# EAGLE board Muhammad Arya Widiantoro_driver (EAGLE 9.6.2)
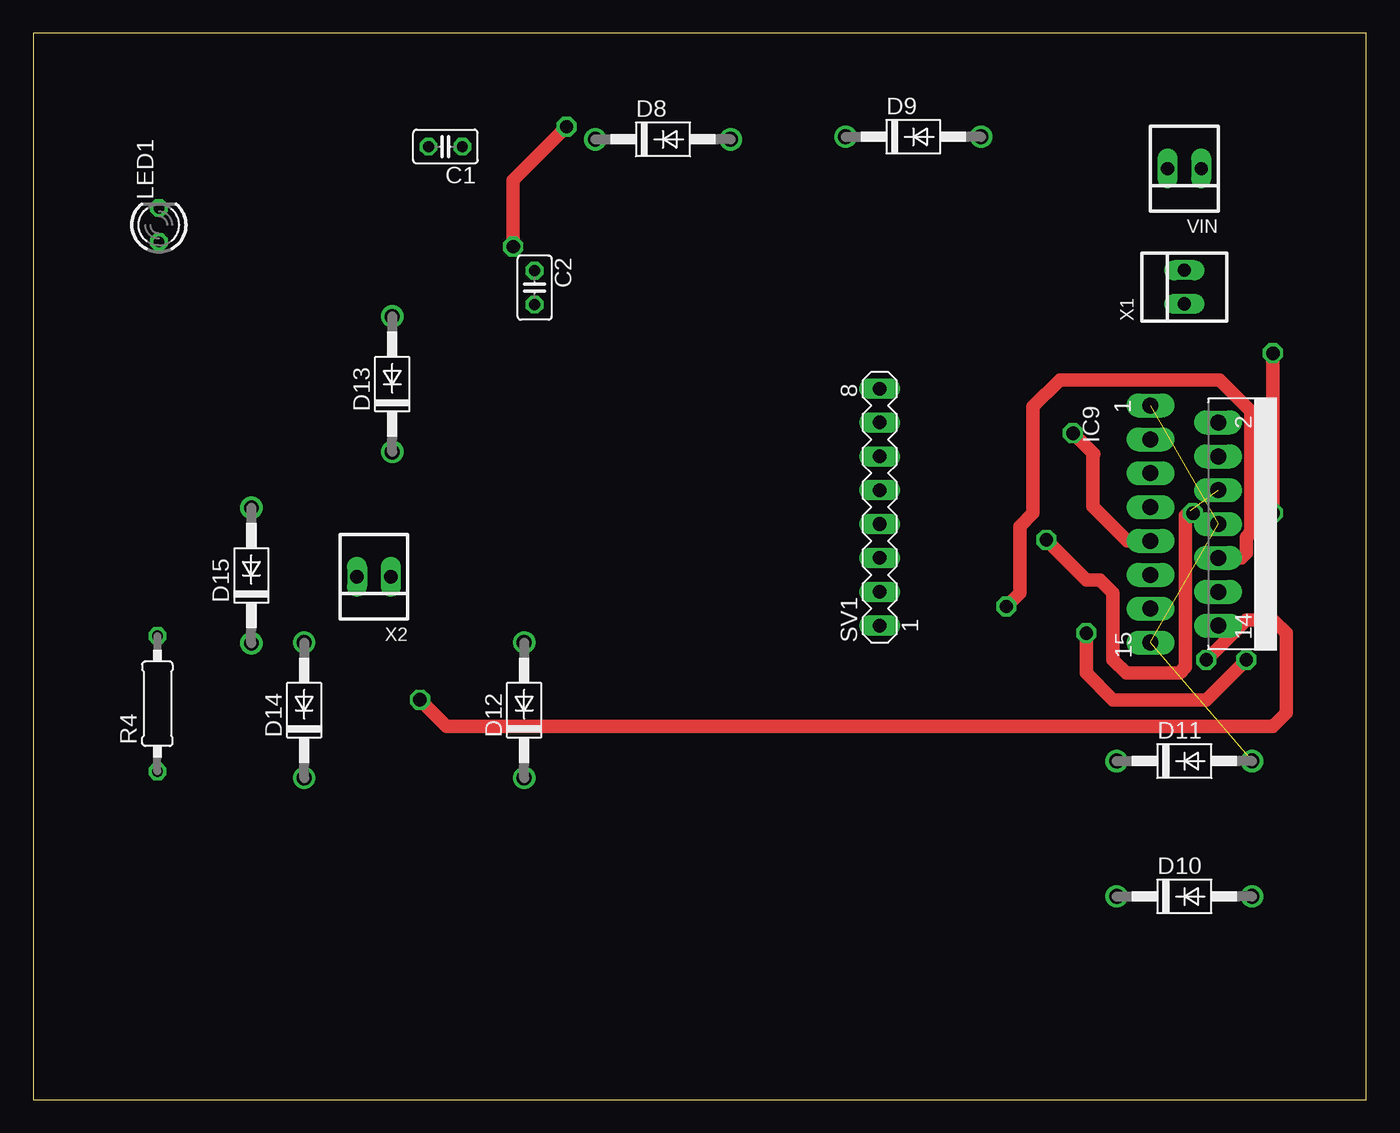
[diagram p0: board, top side]
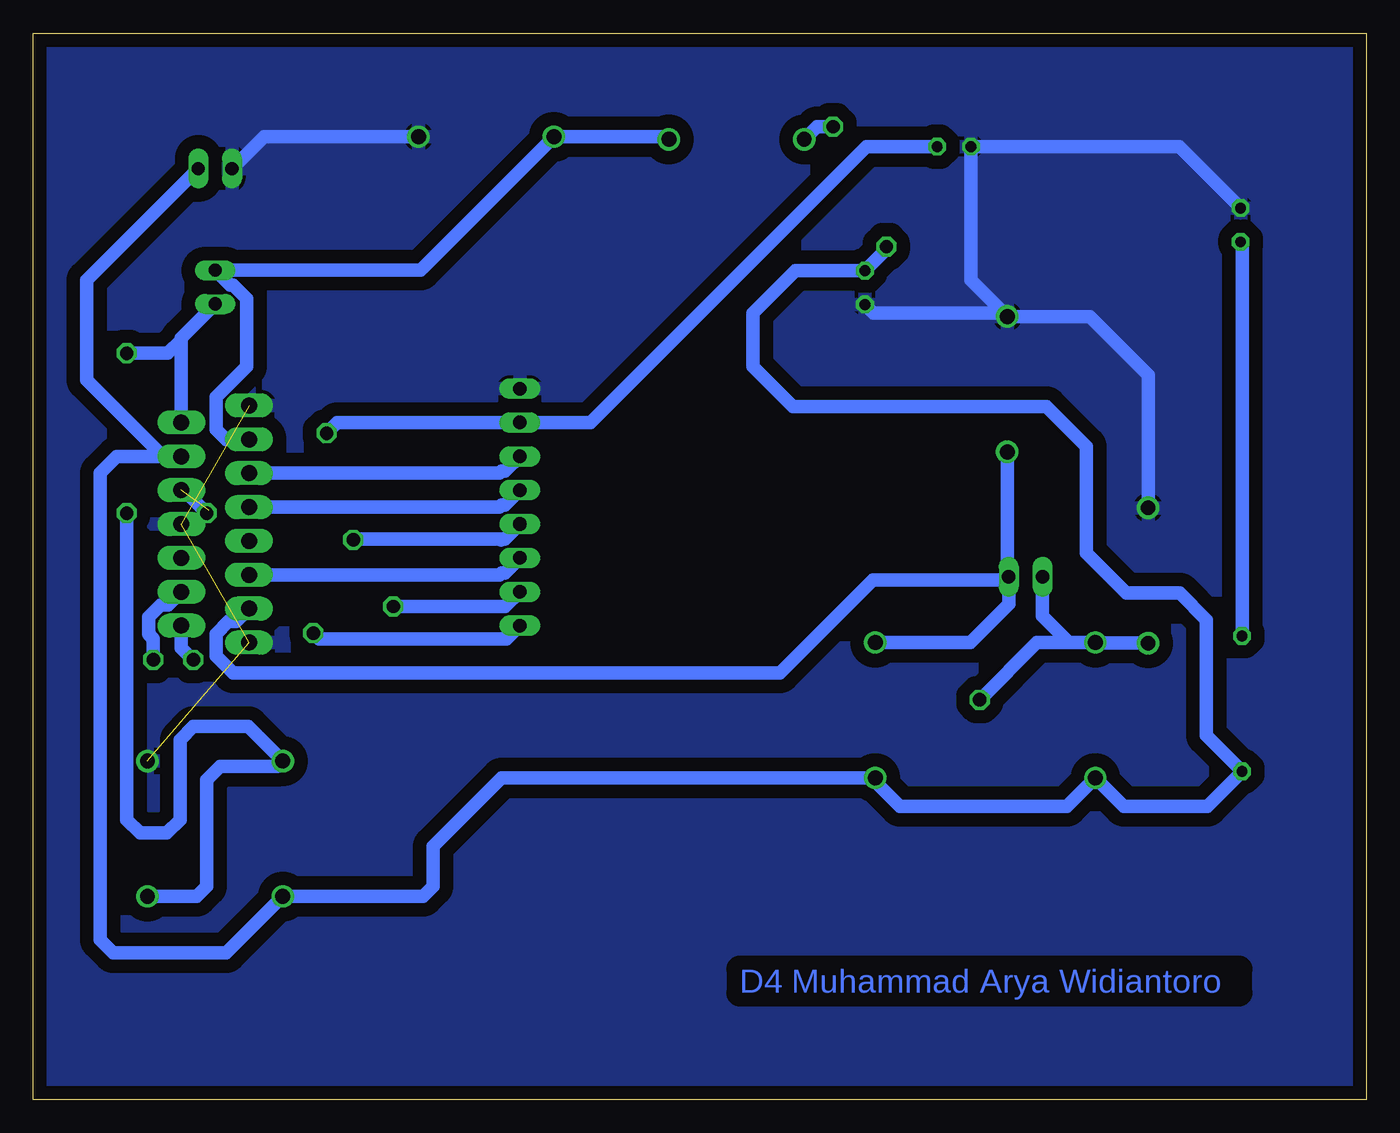
[diagram p1: board, bottom side, seen from below]

Size 100 x 80 mm. Coordinates in mm from the lower left corner, seen from the top.
Outline: 0,0 100,0 100,80 0,80 0,0
Copper layers (1*16): Top 0.035mm / dielectric 1.5mm / Bottom 0.035mm
Design rules "default": minimum track width 6mil, minimum drill 0.35mm, track to track 6mil, track to pad 6mil, pad to pad 6mil, via to via 6mil, smd to smd 6mil, copper to edge 40mil, drill to drill 6mil, minimum pad ring 10mil, minimum via ring 8mil, stop-mask expansion 4mil, vias tented up to drill 0mil, thermal gap 10mil

## Footprints (pad centres in the part's own frame; a part is rotated, then mirrored left to right if it is on the bottom)
C025-025X050 = drill 0.813 octagon: 1 -1.27,0; 2 1.27,0
DO41-10 = drill 1.118: A 5.08,0; C -5.08,0
MULTIWATT-15 = drill 1.2 long: 1 -8.89,-7.62; 2 -7.62,-2.54; 3 -6.35,-7.62; 4 -5.08,-2.54; 5 -3.81,-7.62; 6 -2.54,-2.54; 7 -1.27,-7.62; 8 0,-2.54; 9 1.27,-7.62; 10 2.54,-2.54; 11 3.81,-7.62; 12 5.08,-2.54; 13 6.35,-7.62; 14 7.62,-2.54; 15 8.89,-7.62
LED3MM = drill 0.813 octagon: A -1.27,0; K 1.27,0
0207/10 = drill 0.813 octagon: 1 -5.08,0; 2 5.08,0
MA08-1 = drill 1.016 long: 1 -8.89,0; 2 -6.35,0; 3 -3.81,0; 4 -1.27,0; 5 1.27,0; 6 3.81,0; 7 6.35,0; 8 8.89,0
22-23-2021 = drill 1 long: 1 -1.27,0; 2 1.27,0

## Placement (x,y rotation side)
C1  100nF  [C025-025X050]  30.92,71.5 180 top
C2  100nF  [C025-025X050]  37.61,60.92 270 top
D8  1N4004  [DO41-10]  47.24,72.05 0 top
D9  1N4004  [DO41-10]  66.02,72.24 0 top
D10  1N4004  [DO41-10]  86.36,15.24 0 top
D11  1N4004  [DO41-10]  86.36,25.4 0 top
D12  1N4004  [DO41-10]  36.83,29.21 90 top
D13  1N4004  [DO41-10]  26.93,53.67 90 top
D14  1N4004  [DO41-10]  20.32,29.21 90 top
D15  1N4004  [DO41-10]  16.36,39.32 90 top
IC9  L298  [MULTIWATT-15]  91.44,43.18 270 top
LED1  [LED3MM]  9.42,65.62 90 top
R4  330  [0207/10]  9.31,29.7 90 top
SV1  [MA08-1]  63.5,44.45 90 top
VIN  22-23-2021  [22-23-2021]  86.36,69.85 180 top
X1  22-23-2021  [22-23-2021]  86.36,60.96 90 top
X2  22-23-2021  [22-23-2021]  25.55,39.23 180 top

## Library data of the parts
C1 C2 R4 = rcl
D8-D15 = diode
IC9 = st-microelectronics
LED1 = led
SV1 = con-lstb; OC_FARNELL: unknown; OC_NEWARK: unknown
VIN X1 X2 = con-molex; MF: MOLEX; MPN: 22-23-2021; OC_FARNELL: 1462926; OC_NEWARK: 25C3832

## Nets
GND: C1.2 C2.2 D9.A D11.A D13.A D15.A IC9.1 IC9.8 IC9.15 LED1.K SV1.8 VIN.2
N$1: IC9.5 SV1.6
N$3: IC9.7 SV1.5
N$5: IC9.12 SV1.1
N$8: IC9.10 SV1.2
N$16: IC9.6 SV1.4
N$17: IC9.11 SV1.3
N$44: LED1.A R4.2
N$204: D8.A D9.C IC9.3 X1.2
N$205: D10.A D11.C IC9.2 X1.1
N$206: D12.A D13.C IC9.13 X2.1
N$207: D14.A D15.C IC9.14 X2.2
VCC: C1.1 IC9.9 SV1.7
VDD: C2.1 D8.C D10.C D12.C D14.C IC9.4 R4.1 VIN.1

## Tracks (layer width: path | path; a pad name or v marks a point on that pad's centre or on a via)
GND  (3 unrouted)
  Bottom 1.016: LED1.K 14.03,71.5 C1.2 29.65,61.47 D13.A | D13.A 20.75,58.75 16.36,54.36 D15.A | C2.2 36.96,59 27.18,59 D13.A | VIN.2 82.7,72.24 D9.A
  pour Bottom (isolate 1.016): 0,79 0,0 100,0 100,80 0,80
N$1
  Bottom 1.016: SV1.6 64.62,47.14 64.85,47.14 65,46.99 IC9.5
N$2  (via drill 1)
  Bottom 1.016: v87,44 89,46
N$3
  Bottom 1.016: SV1.5 64.62,44.6 64.85,44.6 65,44.45 IC9.7
N$5  (via drill 1)
  Top 1.016: v79,35 79,32 81,30 88,30 v91,33
  Bottom 1.016: SV1.1 64.5,34.56 78.56,34.56 v79,35 | v91,33 91,34.55 91.36,34.91 91.36,36.21 90.45,37.12 89.88,37.12 IC9.12
N$8  (via drill 1)
  Top 1.016: v73,37 74,38 74,43 75,44 75,52 77,54 89,54 91.36,51.64 91.36,42.53 91,42.17 91,41 90.64,40.64 IC9.10
  Bottom 1.016: SV1.2 64.6,37 v73,37
N$16  (via drill 1)  (1 unrouted)
  Top 1.016: 86.81,44.19 86.44,43.83 86.44,32.44 86,32 82,32 81,33 81,38 80,39 79,39 v76,42
  Bottom 1.016: SV1.4 64.62,42.06 64.85,42.06 | 64.91,42 64.85,42.06 | 64.85,42.06 75.94,42.06 v76,42
N$17
  Bottom 1.016: SV1.3 64.62,39.52 64.85,39.52 65,39.37 IC9.11
N$44
  Bottom 1.016: R4.2 9.31,64.24 LED1.A
N$204
  Bottom 1.016: D8.A 52.51,72.24 D9.C 70.95,62.23 X1.2 85.23,61.1 85.02,61.1 84,60.08 84,55 86.28,52.72 86.28,50.28 85.53,49.53 IC9.3
N$205  (via drill 1)
  Top 1.016: v93,44 v93,56
  Bottom 1.016: D10.A 87.76,15.24 87,16 87,24 86,25 81.68,25 D11.C 83.88,28 88,28 89,27 89,21 90,20 92,20 93,21 v93,44 | X1.1 88.9,57.15 88.9,57 | 88.9,57 IC9.2 | 88.9,57 89.9,56 v93,56
N$206
  Bottom 1.016: D12.A 29.71,34.29 26.82,37.18 X2.1 | D13.C 26.93,39.34 X2.1 | X2.1 27.05,39 37,39 44,32 85,32 86.28,33.28 86.28,34.94 85.37,35.85 84.8,35.85 IC9.13
N$207  (via drill 1)
  Top 1.016: v88,33 91,36 93,36 94,35 94,29 93,28 31,28 v29,30
  Bottom 1.016: D15.C 20.27,34.24 D14.A 21,34.29 22.29,34.29 | X2.2 24.28,36.28 22.29,34.29 | IC9.14 88.9,33.9 v88,33 | v29,30 24.71,34.29 22.29,34.29
VCC  (via drill 1)
  Top 1.016: v78,50 79.5,48.5 | 79.5,48.5 79.58,48.42 | 79.5,48.5 79.5,44.5 82.09,41.91 IC9.9
  Bottom 1.016: C1.1 37.5,71.5 58.2,50.8 SV1.7 77.2,50.8 v78,50
VDD  (via drill 1)
  Top 1.016: v40,73 36,69 v36,64
  Bottom 1.016: VIN.1 96,61.48 96,54 90.26,48.26 IC9.4 93.74,48.26 95,47 95,12 94,11 85.52,11 D10.C 70.76,15.24 70,16 70,19 64.87,24.13 D12.C 36.83,23.83 35,22 22.45,22 D14.C 18.19,22 11.93,22 R4.1 12,27.31 12,36 14,38 18,38 21,41 21,49 24,52 43,52 46,55 46,59 42.81,62.19 C2.1 36,63.8 v36,64 | D8.C 41.21,73 v40,73

## Text on the board
Bottom: D4 Muhammad Arya Widiantoro